# Altium PCB PCB1.PcbDoc (part 2 of 2)
Units mm, origin at the board's own origin, x right, y up, seen from the top; angles counter-clockwise.
Board outline 68.3 x 41 mm, 2 copper layers (Top Layer, Bottom Layer); 84 components, 72 nets, 284 pads, 49 vias.
Unrouted connection lines stored in the file: 26.
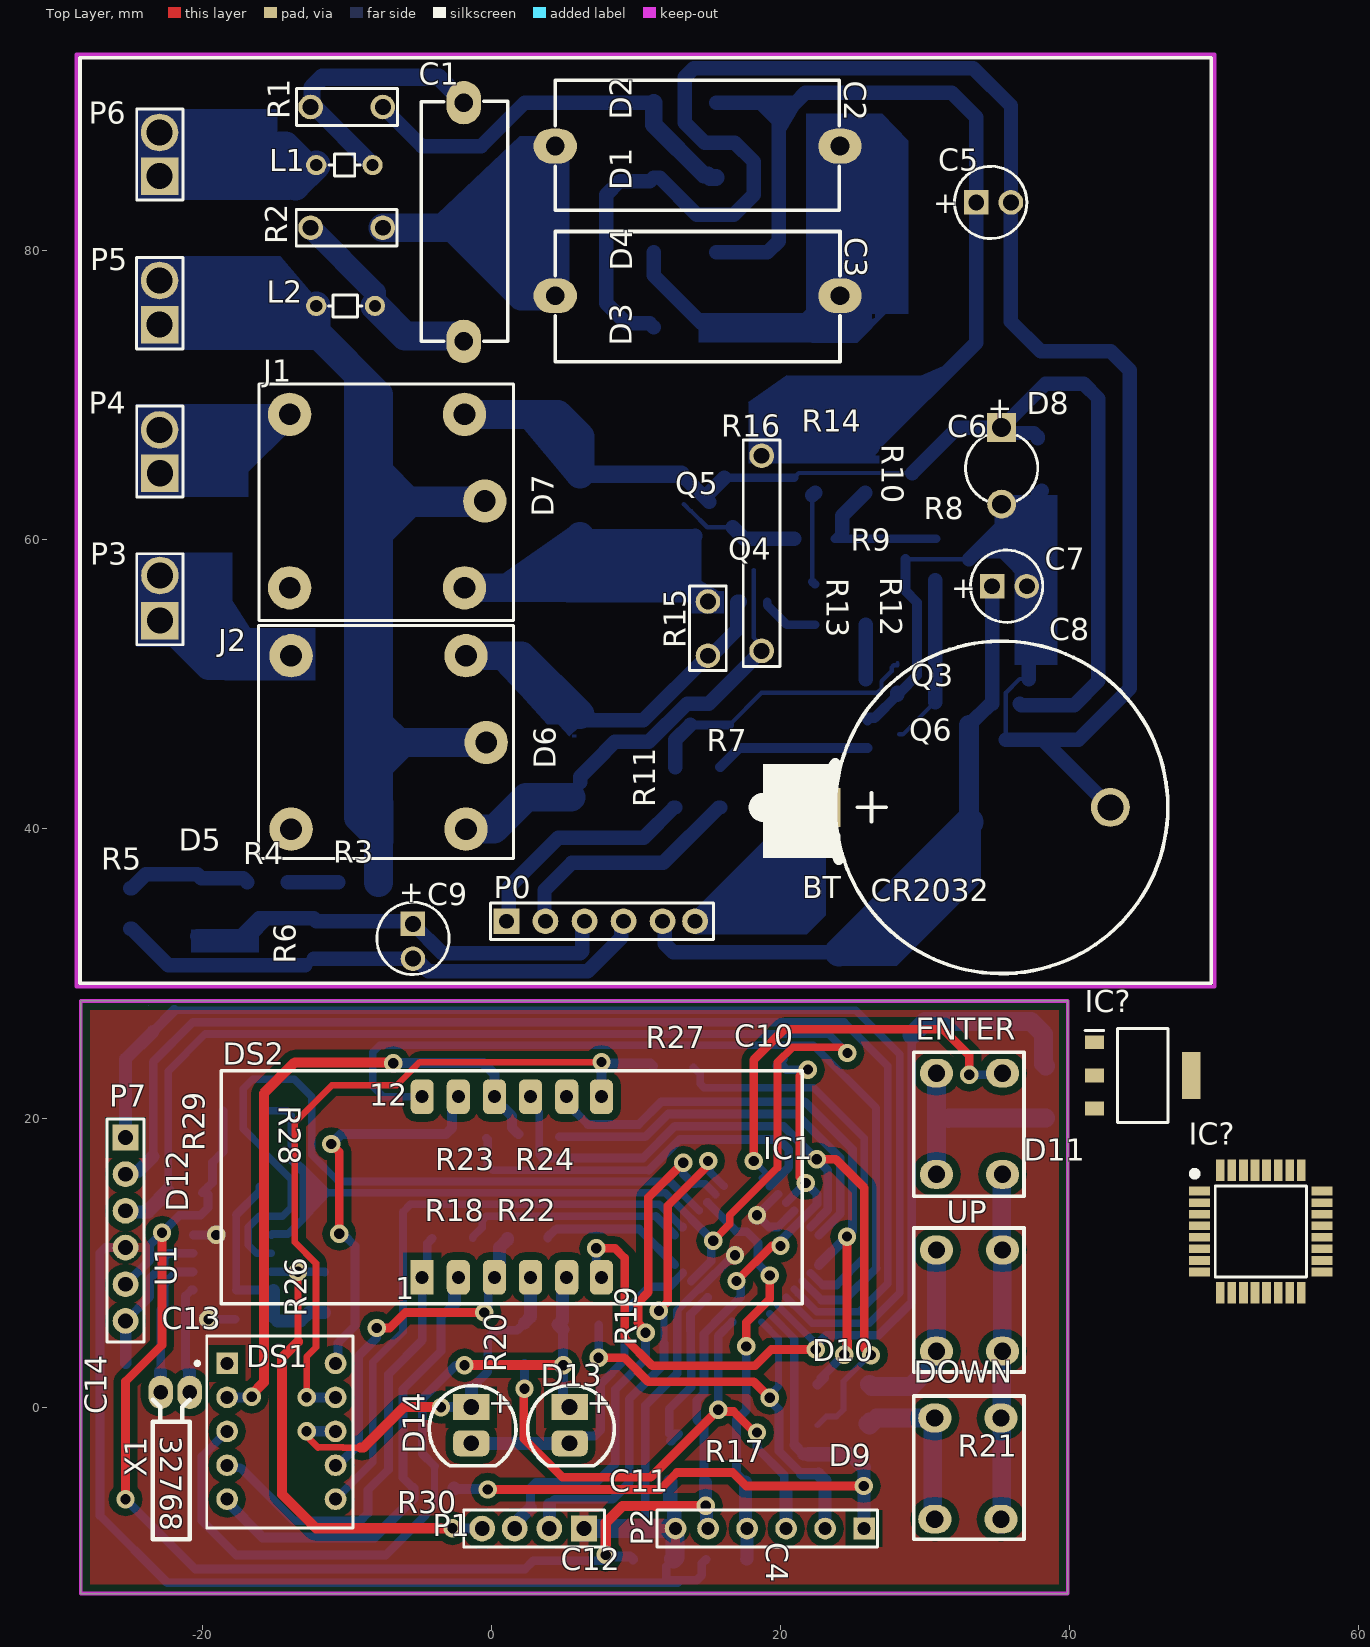
[diagram p0: Top Layer view]

## Other copper (continued)
Bottom Layer: (continued)
  region net NetC2_2: 22.407,74.103 24.357,76.053 26.557,76.053 26.557,75.175 26.377,74.995 26.32,75.052 26.32,76.053 26.882,76.053 27.307,75.628 25.414,73.735 22.977,73.735
  region net NetC2_2: 22.173,73.653 25.332,73.653 27.307,75.628

## Silkscreen, mask and mechanical layers (free items; w line width, h text height)
Top Overlay:
  lines w0.2: -26.57,4.5 -24.03,4.5 ; -0.058,32.35 -0.058,34.89
  lines w0.254: -28.448,29.32 -28.448,93.345 49.802,93.345 49.802,29.32 -28.448,29.32

## Text inside footprints (layer, text, board x,y; h text height)
BT: Top Overlay "CR2032" at 26.257,35.003 h1.52
C5: Top Overlay "+" at 30.577,82.595 h1.5
C6: Top Overlay "+" at 34.552,69.895 h1.5 r270
C7: Top Overlay "+" at 31.81,55.945 h1.5
C9: Top Overlay "+" at -6.168,36.403 h1.5 r270
D13: Top Overlay "+" at 8.093,-0.635 h1.52 r90
D14: Top Overlay "+" at 1.286,-0.635 h1.52 r90
DS2: Top Overlay "1" at -6.631,7.478 h1.52; Top Overlay "12" at -8.449,20.843 h1.52
X1: Top Overlay "32768" at -22.899,-2.023 h1.5 r270